# Altium PCB amir_ali.PcbDoc
Units mil, origin at the board's own origin, x right, y up, seen from the top; angles counter-clockwise.
Board outline 3795.03 x 2265.03 mil, 2 copper layers (Top Layer, Bottom Layer); 28 components, 23 nets, 114 pads, 9 vias.
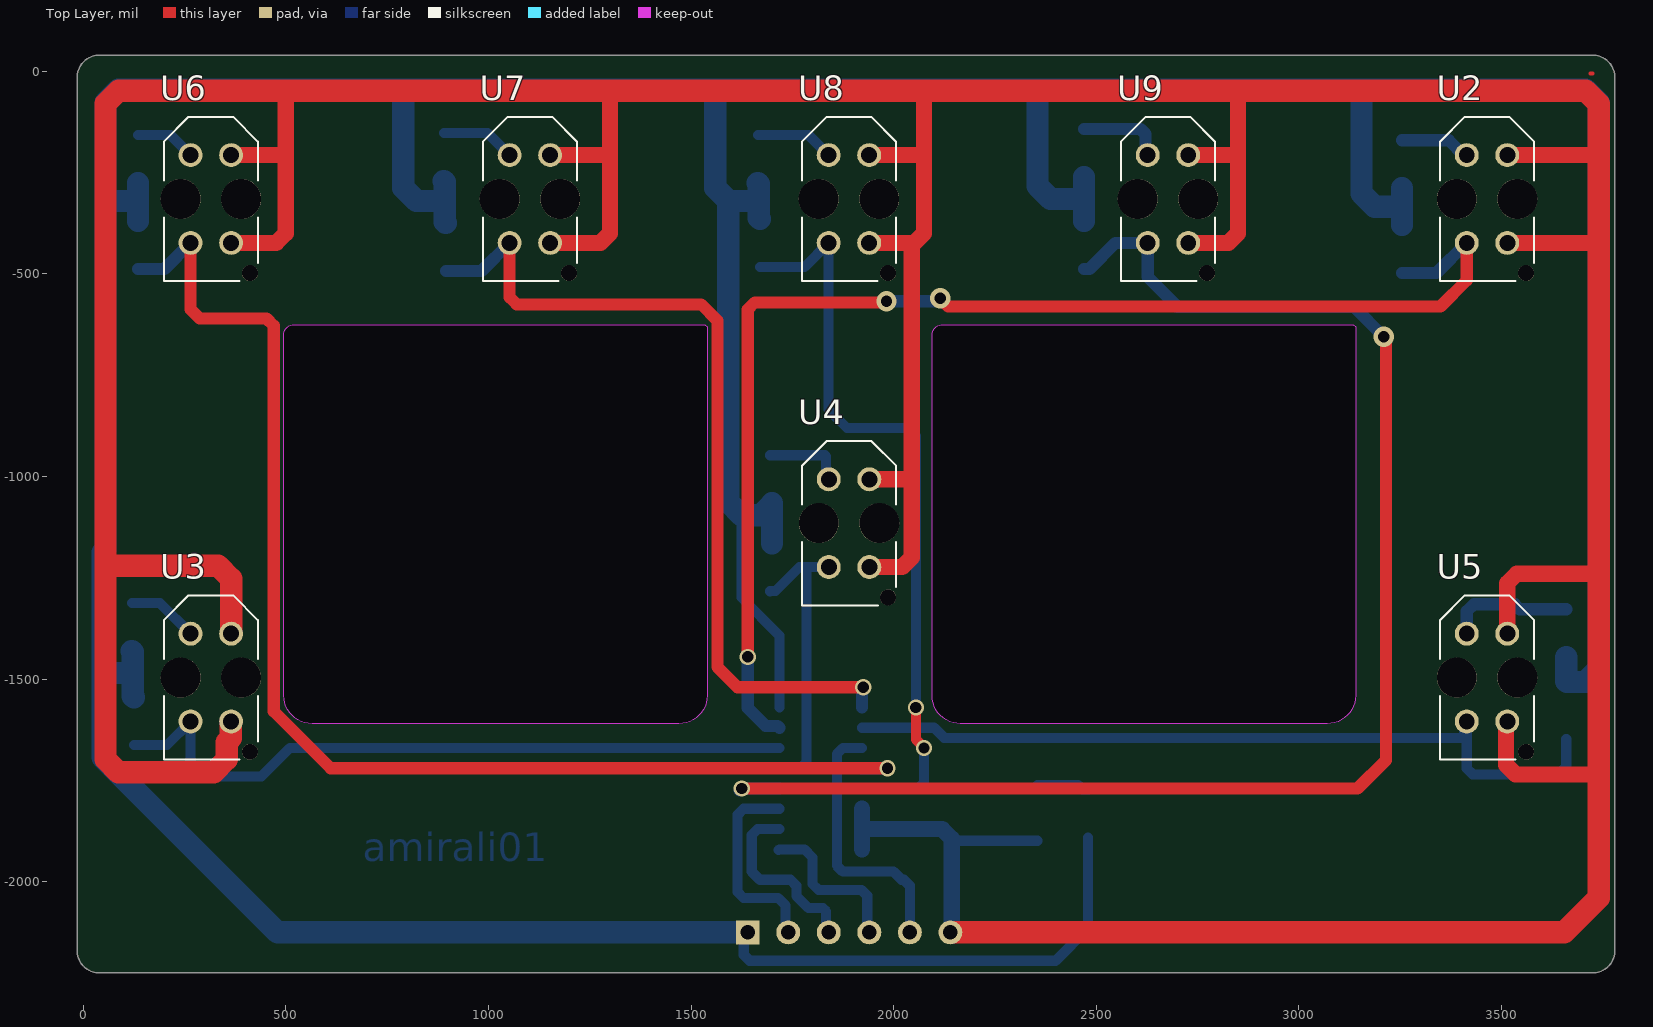
[diagram p0: Top Layer view]
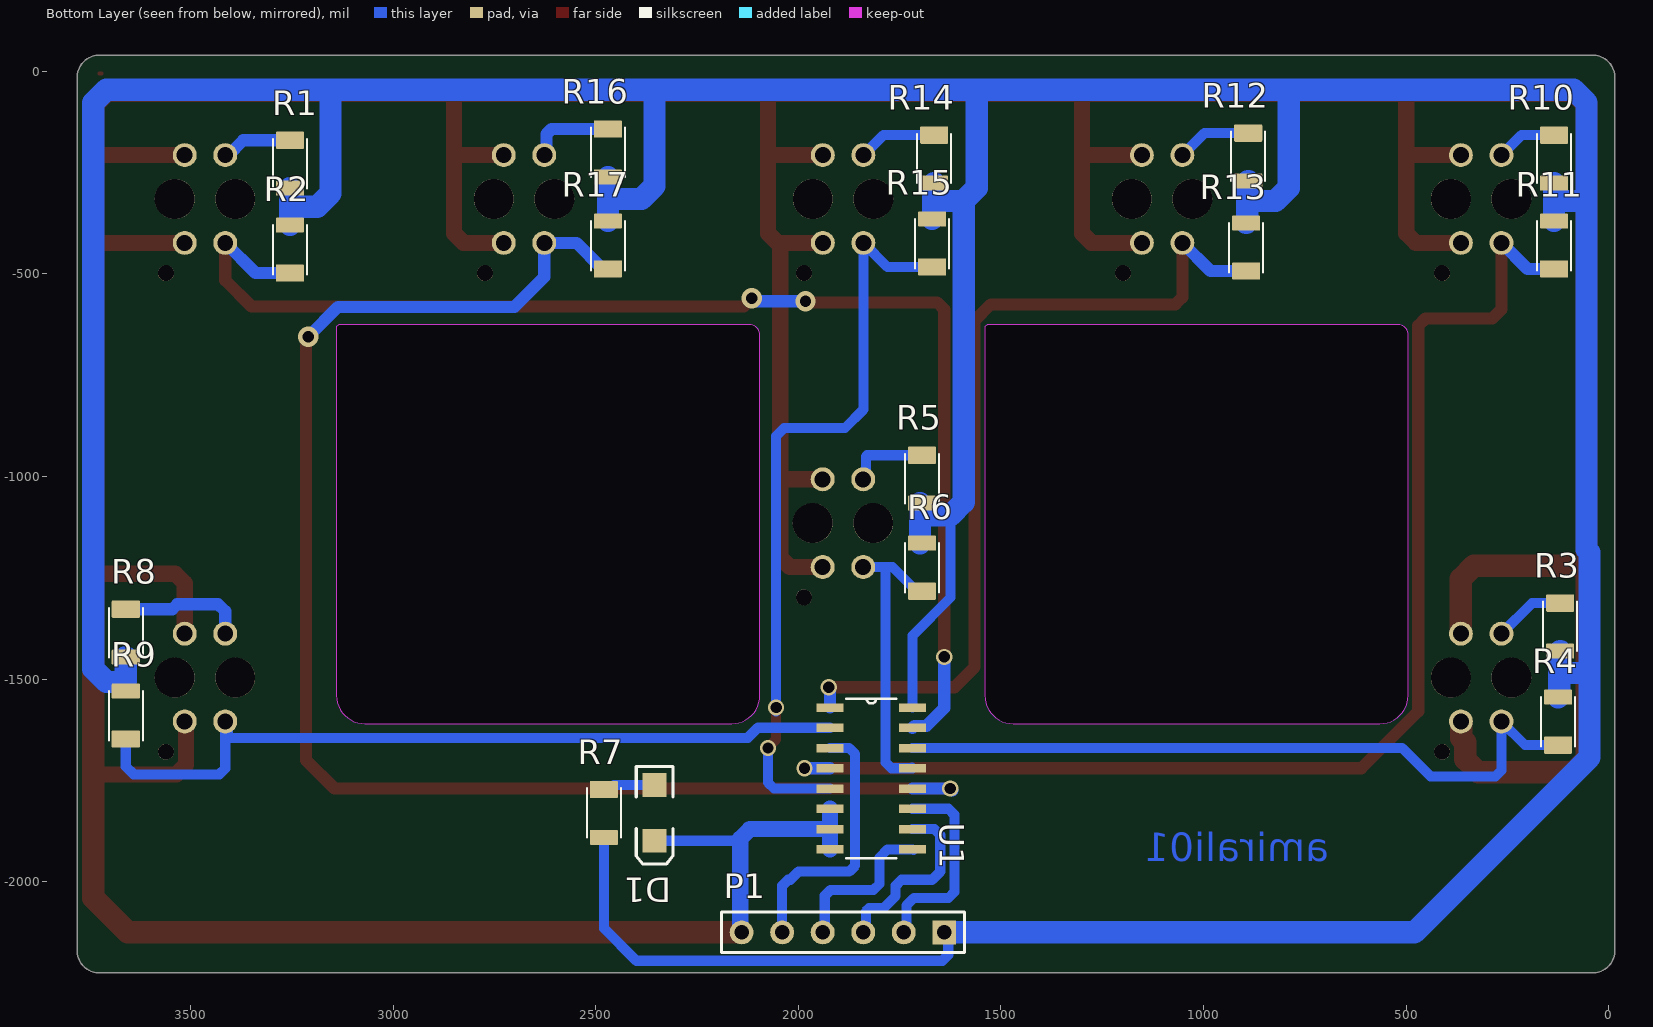
[diagram p1: Bottom Layer view, seen from below]
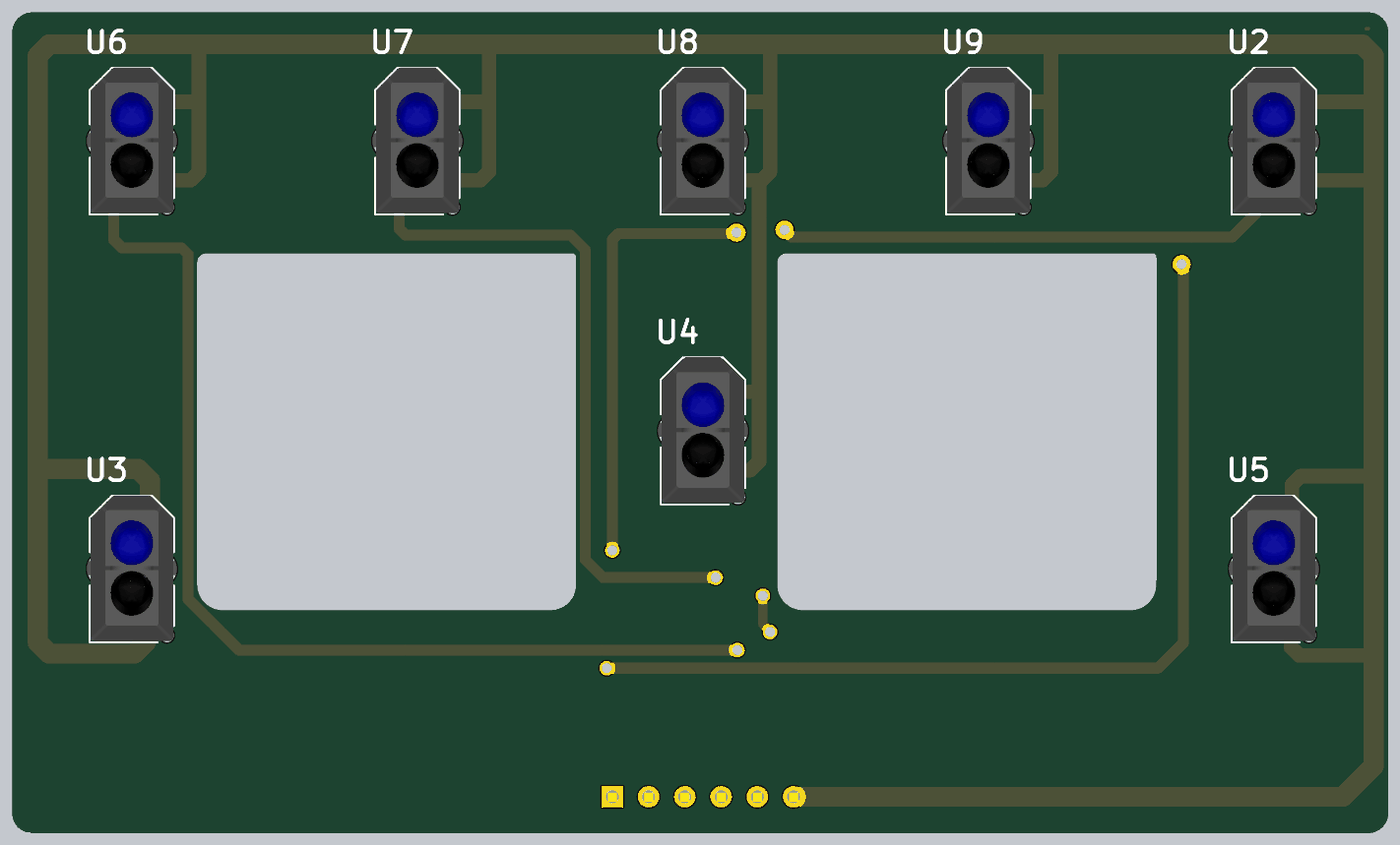
[diagram p2: 3D render of the assembled board from above, using the file's embedded part models]

## Layer stack, top to bottom
Top Solder: solder mask 0.4, Solder Resist, Dk 3.5
Top Layer: signal copper 1.4
Dielectric 1: dielectric 12.6, FR-4, Dk 4.8
Bottom Layer: signal copper 1.4
Bottom Solder: solder mask 0.4, Solder Resist, Dk 3.5

## Board outline
40,-2225.01 cw(c40,-2170) -15.01,-2170 -15.01,-15 cw(c40,-15) 40,40.02 3725,40.02 cw(c3725,-15) 3780.02,-15 3780.02,-2170 cw(c3725,-2170) 3725,-2225.01
cut-out: 2095,-1540 2095,-650 cw(c2120,-650) 2120,-625 3134.14,-625 3140,-630.86 3140,-1540 cw(c3070,-1540) 3070,-1610 2165,-1610 cw(c2165,-1540)
cut-out: 495,-1540 495,-650 cw(c520,-650) 520,-625 1534.14,-625 1540,-630.86 1540,-1540 cw(c1470,-1540) 1470,-1610 565,-1610 cw(c565,-1540)

## Design rules (kind name [scope] priority, off if disabled: settings)
Clearance [All] p1: gap=10 ignorepadtopadclearanceinfootprint=FALSE except(0: Arc-Hole Track-Hole SMDPad-Hole THPad-Hole Via-Hole Fill-Hole Poly-Hole Region-Hole Text-Hole)
PolygonConnect [All] p1: connectstyle=Relief reliefconductorwidth=10 reliefentries=4 polygonreliefangle="90 Angle" airgapwidth=10
RoutingVias [All] p1: holewidth=28 width=50 viastyle="Through Hole" minholewidth=28 minwidth=50 maxholewidth=28 maxwidth=50
SolderMaskExpansion [All] p1: expansion=4 istentingtop=FALSE
Width [All] p1: maxlimit=55 minlimit=25 preferedwidth=40 minimp=50.000000 maximp=50.000000 favimp=50.000000
30 further rules are at their usual default settings.

## Components (designator, comment, footprint, x,y, rotation, side; value= is the part's Value field where it differs from the comment)
D1 "SMD 1206 LED" "LED 1206" 2355,-1830 r270 bottom
P1 "Header 6" HDR1X6 1640,-2125 r0 bottom
R1 "1879462-3" RESC3115X65N 3255,-227.68 r270 bottom
R2 "1879462-3" RESC3115X65N 3255,-440 r90 bottom
R3 "1879462-3" RESC3115X65N 120,-1370 r270 bottom
R4 "1879462-3" RESC3115X65N 125,-1605 r90 bottom
R5 "1879462-3" RESC3115X65N 1695,-1005 r270 bottom
R6 "1879462-3" RESC3115X65N 1695,-1225 r90 bottom
R7 "1879462-3" RESC3115X65N 2480,-1830 r270 bottom
R8 "1879462-3" RESC3115X65N 3660,-1385 r270 bottom
R9 "1879462-3" RESC3115X65N 3660,-1590 r90 bottom
R10 "1879462-3" RESC3115X65N 135,-215 r270 bottom
R11 "1879462-3" RESC3115X65N 135,-430 r90 bottom
R12 "1879462-3" RESC3115X65N 890,-210 r270 bottom
R13 "1879462-3" RESC3115X65N 895,-435 r90 bottom
R14 "1879462-3" RESC3115X65N 1665,-215 r270 bottom
R15 "1879462-3" RESC3115X65N 1670,-425 r90 bottom
R16 "1879462-3" RESC3115X65N 2470,-200 r270 bottom
R17 "1879462-3" RESC3115X65N 2470,-430 r90 bottom
U1 "74HC4051D" SOIC127P600X175-16N 1820,-1745 r180 bottom
U2 "TCRT5000" OPTO_TCRT5000 3464.57,-314.96 r90 top
U3 "TCRT5000" OPTO_TCRT5000 314.96,-1496.06 r90 top
U4 "TCRT5000" OPTO_TCRT5000 1890,-1115 r90 top
U5 "TCRT5000" OPTO_TCRT5000 3464.57,-1496.06 r90 top
U6 "TCRT5000" OPTO_TCRT5000 314.96,-314.96 r90 top
U7 "TCRT5000" OPTO_TCRT5000 1102.36,-314.96 r90 top
U8 "TCRT5000" OPTO_TCRT5000 1889.76,-314.96 r90 top
U9 "TCRT5000" OPTO_TCRT5000 2677.17,-314.96 r90 top

## Footprints (in the part's own frame and the unit in brackets; to place one, negate y for a bottom-side part, rotate by r counter-clockwise, add the part's x,y. Pads: shape width x height; smd on the part's side, far side on the other; paste and mask are expansions set on the pad)
HDR1X6 [mm] "Connector; Header; 6 Position"
  rect 1.5x1.5 hole 0.9: 1(0,0)
  round 1.5 hole 0.9: 2(2.54,0) 3(5.08,0) 4(7.62,0) 5(10.16,0) 6(12.7,0)
  silkscreen extent -1.27,-1.27 13.97,1.27, body extent -1.26,-1.25 13.98,1.29, height 8.38
"LED 1206" [mm]
  rect 1.5x1.5 smd: 1(-1.75,0) 2(1.75,0)
  silkscreen extent -2.9,-1.15 3.2,1.15, body extent -1.65,-0.72 1.65,0.73, height 1.36
OPTO_TCRT5000 [mm]
  round 1.5 hole 1: A(2.75,1.27) CATH(2.75,-1.27) COLL(-2.75,1.27) E(-2.75,-1.27)
  round 1 hole 1 unplated: ""(-4.65,-2.45)
  round 2.5 hole 2.5 unplated: ""(0,1.9) ""(0,-1.9)
  silkscreen extent -5.15,-2.95 5.15,2.95, body extent -5.04,-3.4 5.16,3.4, height 6.7
RESC3115X65N [mm]
  rrect14% 1.09x1.77 smd: 1(-1.465,0)
  rrect14% 0.94x1.77 smd: 2(1.54,0)
  silkscreen extent -1.55,-1.07 1.55,1.07
SOIC127P600X175-16N [mil]
  rect 67x21 smd: 1(-102,175) 2(-102,125) 3(-102,75) 4(-102,25) 5(-102,-25) 6(-102,-75) 7(-102,-125) 8(-102,-175) 9(102,-175) 10(102,-125) 11(102,-75) 12(102,-25) 13(102,25) 14(102,75) 15(102,125) 16(102,175)
  silkscreen extent -62,-197 62,197

## Part data
D1: library part "LED SMD 1206"
P1: "Header, 6-Pin", LatestRevisionDate=17-Jul-2002, LatestRevisionNote="Re-released for DXP Platform.", Publisher="Altium Limited"
R1 R2 R3 R4 R5 R6 R7 R8 R9 R10 R11 R12 R13 R14 R15 R16 R17: "RL73H 2B R12 1% 5K RL", Package=None, Availability=Unavailable, MP=1879462-3, Price=None
U1: "1 Circuit IC Switch 8:1 130Ohm 16-SOIC", Package="SOIC-16 Toshiba", Availability="In Stock", Check_prices=https://www.snapeda.com/parts/74HC4051D/Toshiba/view-part/?ref=eda, MF=Toshiba, MP=74HC4051D, Price=None, Purchase-URL=https://pricing.snapeda.com/search/part/74HC4051D/?ref=eda, SnapEDA_Link=https://www.snapeda.com/parts/74HC4051D/Toshiba/view-part/?ref=snap
U2 U3 U4 U5 U6 U7 U8 U9: "950 nm 60 mA Through Hole Reflective Optical Sensor with Transistor Output", Package=None, Availability=Unavailable, MP=TCRT5000, Price=None

## Via types
v1: diameter 40, hole 28, Top Layer to Bottom Layer, 6 vias
v2: diameter 50, hole 28, Top Layer to Bottom Layer, 3 vias

## Nets (pads, with @x,y where several pads share a name; then routed paths per layer and width w, separated by ;. In a path a pad name is that pad's centre, name@x,y a point inside that pad or via, vN(x,y) a via of type N, cw(c..) or ccw(c..) an arc to the next point about the centre after c; other vN are vias at no path point)
+5: P1.1 R1.2 R2.2 R3.2 R4.2 R5.2 R6.2 R7.2 R8.2 R9.2 R10.2 R11.2 R12.2 R13.2 R14.2 R15.2 R16.2 R17.2 U1.16 | length 13551.1
  Bottom Layer w25: 1624.44,-1095.63 1624.44,-1298.47 1718,-1392.04 U1.16 ; P1.1 1630,-2135 1630,-2180.36 1644.64,-2195 2400,-2195 2480,-2115 R7.2
  Bottom Layer w55: R3.2 122.5,-1433.13 122.5,-1487.5 ; R4.2 122.5,-1541.87 122.5,-1487.5 ; R11.2 135,-322.5 ; R10.2 135,-322.5 ; R12.2 892.5,-273.13 892.5,-322.5 ; R13.2 892.5,-371.87 892.5,-322.5 ; P1.1 479.75,-2125 47.66,-1692.91 47.66,-1485 ; R14.2 1667.5,-278.13 1667.5,-320 ; R15.2 1667.5,-361.87 1667.5,-320 ; R6.2@1700,-1164.37 R5.2@1700,-1067.28 ; R5.2@1700,-1065.63 R5.2@1700,-1067.28 ; R17.2 2470,-315 ; R16.2 2470,-315 ; R2.2 3255,-333.84 ; R1.2 3255,-333.84 ; R8.2 3660,-1505 3662.22,-1507.22 3707.78,-1507.22 3740,-1475 3740,-77.22 3707.78,-45 3165,-45 ; 47.66,-1485 47.66,-1187.34 55,-1180 55,-320 ; 47.66,-1485 120,-1485 122.5,-1487.5 ; 55,-320 55,-77.22 87.22,-45 785,-45 ; 55,-320 132.5,-320 135,-322.5 ; 785,-45 1570,-45 ; 785,-45 790,-50 790,-287.78 822.22,-320 890,-320 892.5,-322.5 ; 1570,-45 2365,-45 ; 1570,-45 1560,-55 1560,-287.78 1592.22,-320 ; 1592.22,-320 1667.5,-320 ; 1592.22,-320 1592.22,-1063.41 1624.44,-1095.63 1671.65,-1095.63 R5.2@1700,-1067.28 ; 2365,-45 3165,-45 ; 2365,-45 2355,-55 2355,-282.78 2387.22,-315 2470,-315 ; 3165,-45 3155,-55 3155,-301.62 3187.22,-333.84 3255,-333.84
GND: D1.2 P1.6 U1.6 U1.7 U1.8 U2.CATH U2.E U3.CATH U3.E U4.CATH U4.E U5.CATH U5.E U6.CATH U6.E U7.CATH U7.E U8.CATH U8.E U9.CATH U9.E | length 15290.8
  Top Layer w40: U6.E 476.57,-423.23 500,-399.8 500,-205 ; U6.CATH 498.31,-206.69 500,-205 ; 500,-47.5 500,-205 ; U7.E 1276.57,-423.23 1300,-399.8 1300,-210 ; U7.CATH 1296.69,-206.69 1300,-210 ; 1300,-47.5 1300,-210 ; U8.E 2051.57,-423.23 ; U8.CATH 2071.69,-206.69 2075,-210 ; U4.E 2021.57,-1223.27 2045,-1199.84 2045,-1015 ; U4.CATH 2036.73,-1006.73 2045,-1015 ; 2075,-47.5 2075,-210 ; U9.E 2826.57,-423.23 2850,-399.8 2850,-210 ; U9.CATH 2846.69,-206.69 2850,-210 ; 2845,-47.5 2850,-52.5 2850,-210 ; U5.E 3511.34,-1607.56 3511.34,-1711.57 3534.77,-1735 3735,-1735 3740,-1740 ; U5.CATH 3514.57,-1263.43 3538,-1240 3735,-1240 3740,-1245 ; U2.E 3731.77,-423.23 3740,-415 ; U2.CATH 3736.69,-206.69 3740,-210 ; 2045,-1015 2045,-429.8 2051.57,-423.23 ; 2051.57,-423.23 2075,-399.8 2075,-210
  Top Layer w55: U3.E 364.18,-1605.11 364.18,-1645.49 354.23,-1655.45 354.23,-1697.78 322.01,-1730 87.22,-1730 55,-1697.78 55,-1220 ; U3.CATH 364.96,-1252.22 332.74,-1220 55,-1220 ; P1.6 3655,-2125 3740,-2040 3740,-1740 3740,-1245 3740,-415 3740,-210 3740,-79.72 3707.78,-47.5 2845,-47.5 2075,-47.5 1300,-47.5 500,-47.5 87.5,-47.5 55,-80 55,-1220
  Bottom Layer w25: 2143.43,-1893.43 2148.9,-1898.9 D1.2
  Bottom Layer w40: U1.8 U1.7 ; U1.6 U1.7 ; P1.6 2143.43,-2121.57 2143.43,-1893.43 2120,-1870 U1.7
NetD1_1: D1.1 R7.1 | length 129.6
  Bottom Layer w25: D1.1 2455.39,-1761.1 2466.61,-1772.32 R7.1
NetR1_1: R1.1 U2.A | length 174.8
  Bottom Layer w30: R1.1 3370.01,-170 3406.7,-206.69 U2.A
NetR3_1: R3.1 U3.A | length 176.2
  Bottom Layer w25: R3.1 189.49,-1312.32 U3.A
NetR5_1: R5.1 U4.A | length 198.8
  Bottom Layer w25: R5.1 1830.36,-947.32 1833.48,-950.45 1833.48,-1000.22 U4.A
NetR8_1: R8.1 U5.A | length 313
  Bottom Layer w30: U5.A 3414.57,-1332.57 3432.14,-1315 3533.22,-1315 3545.54,-1327.32 R8.1
NetR10_1: R10.1 U6.A | length 150.4
  Bottom Layer w25: R10.1 215.59,-157.32 U6.A
NetR12_1: R12.1 U7.A | length 184.9
  Bottom Layer w25: R12.1 997.99,-152.32 U7.A
NetR14_1: R14.1 U8.A | length 195.2
  Bottom Layer w25: R14.1 1790.39,-157.32 U8.A
NetR16_1: R16.1 U9.A | length 211.2
  Bottom Layer w30: R16.1 2609.59,-142.32 2621.61,-154.34 2621.61,-201.13 U9.A
out: P1.5 U1.3 | length 659.5
  Bottom Layer w25: U1.3 1874.64,-1670 1860,-1684.64 1860,-1960.36 1874.64,-1975 2000,-1975 2020,-1995 2025.36,-1995 2040,-2009.64 P1.5
S0: P1.2 U1.11 | length 501.2
  Bottom Layer w25: U1.11 1629.64,-1820 1615,-1834.64 1615,-2025.36 1629.64,-2040 1715,-2040 1733.48,-2058.48 1733.48,-2118.48 P1.2
S1: P1.3 U1.10 | length 458.2
  Bottom Layer w25: U1.10 1664.64,-1870 1650,-1884.64 1650,-1975 1670,-1995 1745.36,-1995 1760,-2009.64 1760,-2035.36 1789.64,-2065 1825.36,-2065 1833.48,-2073.13 1833.48,-2118.48 P1.3
S2: P1.4 U1.9 | length 398
  Bottom Layer w25: U1.9@1716,-1922 U1.9 1780,-1920 1800,-1940 1800,-2005.36 1814.64,-2020 1920.36,-2020 1935,-2034.64 1935,-2120 P1.4
y0: R6.1 U1.13 U4.COLL | length 728.1
  Bottom Layer w25: R6.1@1695.36,-1283.03 R6.1 1708.39,-1282.68 1767.8,-1223.27 1785,-1223.27 ; U1.13@1720,-1718 U1.13 1770.36,-1720 1785,-1705.36 1785,-1223.27 ; U4.COLL 1785,-1223.27
y1: R4.1 U1.14 U3.COLL | length 1773.2
  Bottom Layer w25: R4.1 206.61,-1662.68 U3.COLL 264.96,-1725.32 279.64,-1740 440,-1740 510,-1670 U1.14
y2: R2.1 U1.15 U2.COLL | length 3189.1
  Top Layer w30: v1(1640,-1445) 1640,-587.57 1657.57,-570 1980,-570 v2(1982.5,-567.5) v2@1985,-565 ; v2(2115,-560) 2135,-580 3350,-580 3414.57,-515.43 U2.COLL
  Bottom Layer w30: v1(1640,-1445) 1640,-1571.36 1684.14,-1615.5 1713.5,-1615.5 U1.15 ; v2(1982.5,-567.5) 2102.09,-567.5 2109.59,-560 v2(2115,-560) ; R2.1 3340.12,-497.68 U2.COLL
y3: R17.1 U1.12 U9.COLL | length 3676.1
  Top Layer w30: v1(1625,-1770) 3145,-1770 3215,-1700 v2@3215,-655
  Bottom Layer w30: v1@1620,-1775 v1(1625,-1770) U1.12 ; R17.1 2483.39,-487.68 2547.84,-423.23 U9.COLL 2627.17,-507.43 2700.95,-581.21 3136.21,-581.21 v2(3210,-655)
y4: R13.1 U1.1 U7.COLL | length 2143.8
  Top Layer w30: U7.COLL 1052.36,-557.43 1069.94,-575 1525,-575 1565,-615 1565,-1470 1615,-1520 v1(1925,-1520)
  Bottom Layer w30: R13.1 982.91,-492.68 U7.COLL ; U1.1 1922,-1523 v1(1925,-1520)
y5: R15.1 U1.5 U8.COLL | length 1880.9
  Top Layer w25: v1(2055,-1570) 2055,-1648.65 2075,-1668.65 v1(2075,-1670)
  Bottom Layer w25: R15.1 1780.31,-482.68 U8.COLL 1839.76,-834.76 1885,-880 2035,-880 2055,-900 v1(2055,-1570) v1@2055,-1580 ; U1.5 2060.36,-1770 2075,-1755.36 v1(2075,-1670)
y6: R9.1 U1.2 U5.COLL | length 1978.4
  Bottom Layer w25: U1.2 2100,-1620 2125,-1645 3399.92,-1645 3408.05,-1636.87 3408.05,-1610.85 U5.COLL 3414.57,-1720.36 3429.21,-1735 3640.36,-1735 3660,-1715.36 R9.1
y7: R11.1 U1.4 U6.COLL | length 3120.5
  Top Layer w30: U6.COLL 264.96,-587.39 287.57,-610 452.43,-610 470,-627.57 470,-1579.35 610.65,-1720 v1(1985,-1720)
  Bottom Layer w30: R11.1 200.51,-487.68 U6.COLL ; U1.4 v1@1975,-1720
pads on no net: U2. U3. U4. U5. U6. U7. U8. U9.
copper on no net: | length 5
  Top Layer w10: 3720,-5 3725,-5

## Other copper
Bottom Layer:
  text "amirali01" at 690,-1950 h70